# Altium PCB picphlipvfdnew.PcbDoc (part 1 of 2)
Units mm, origin at the board's own origin, x right, y up, seen from the top; angles counter-clockwise.
Board outline 243.3 x 58.75 mm, 4 copper layers (Top Layer, Internal Plane 1, Internal Plane 2, Bottom Layer); 81 components, 82 nets, 400 pads, 146 vias.
Unrouted connection lines stored in the file: 61.
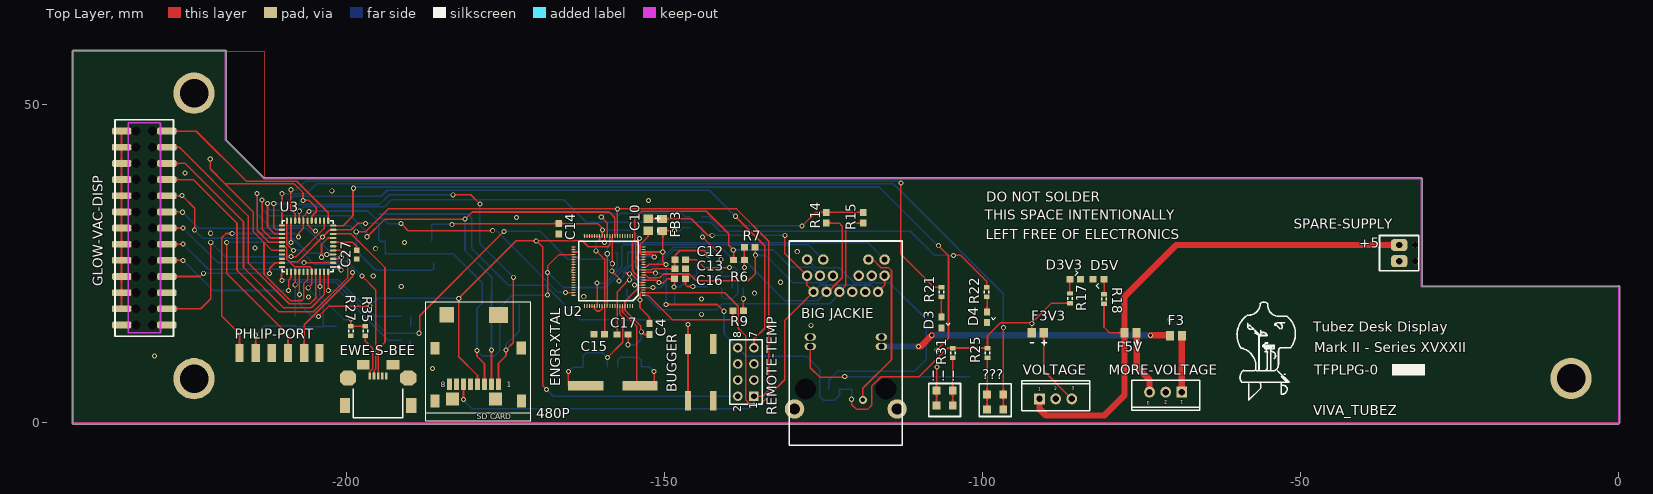
[diagram p0: Top Layer view]
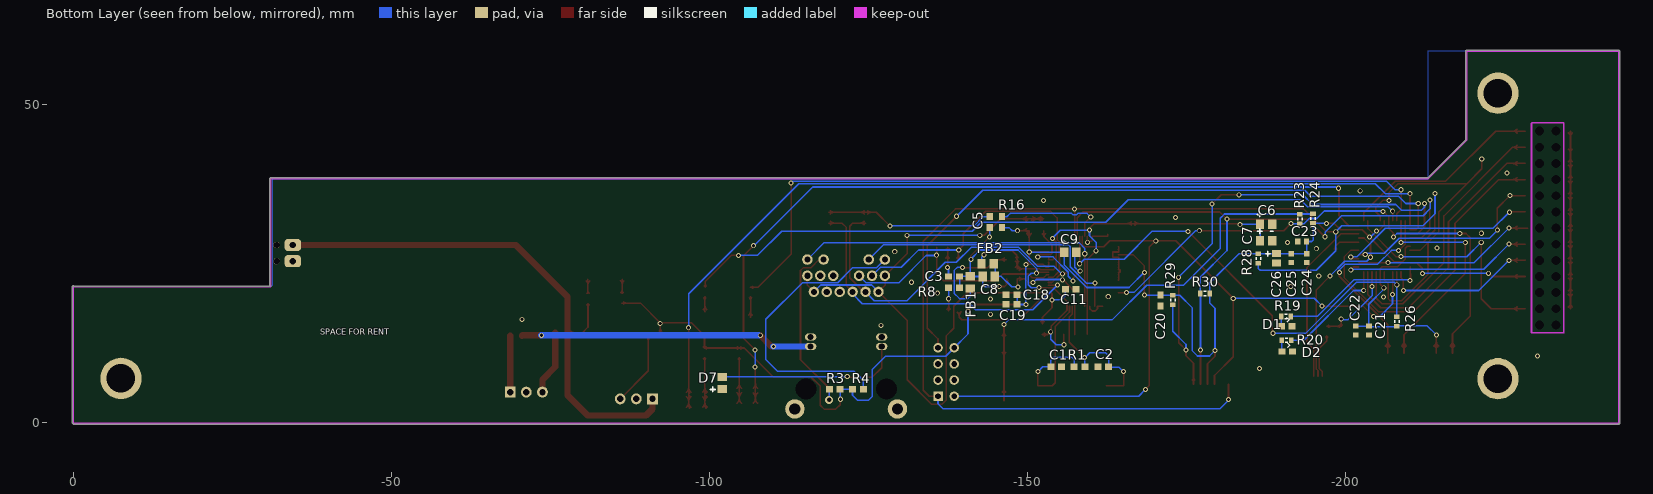
[diagram p1: Bottom Layer view, seen from below]
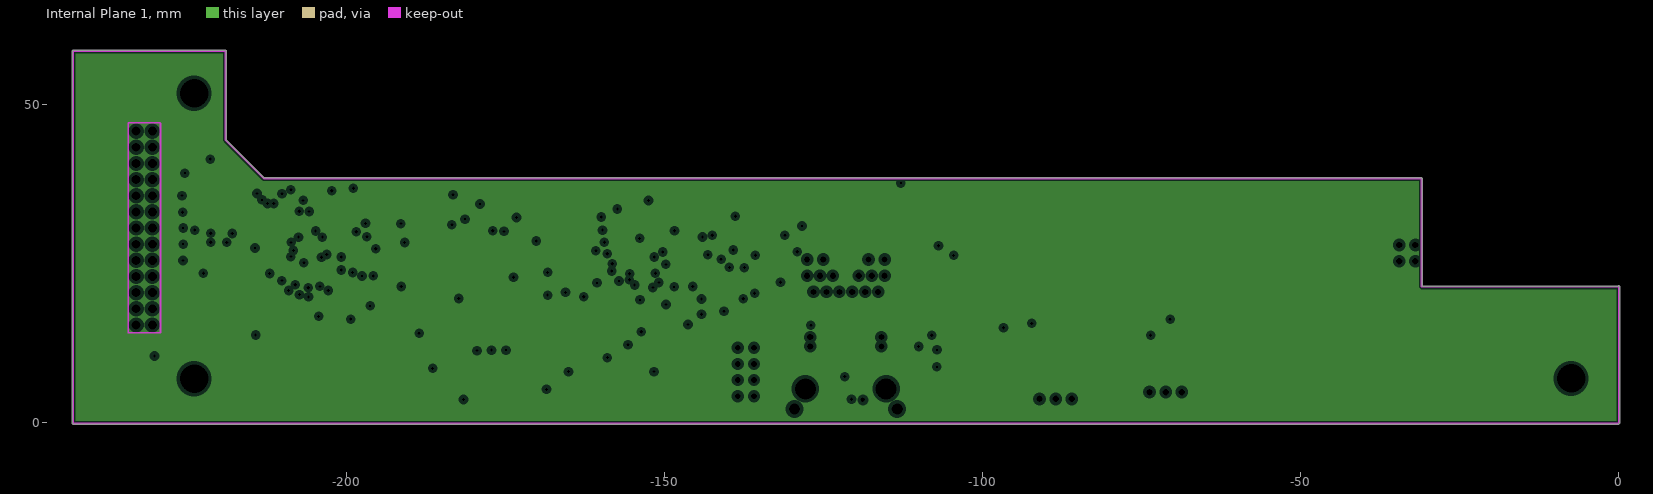
[diagram p2: Internal Plane 1, clearances drawn from the general rule]
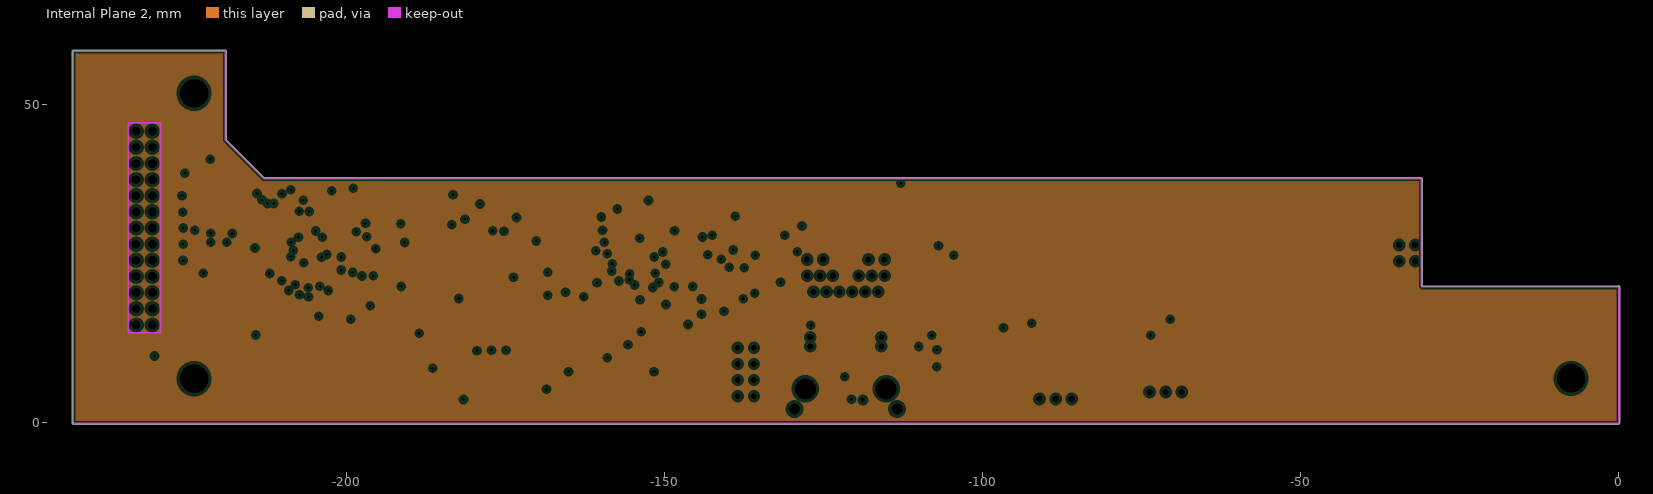
[diagram p3: Internal Plane 2, clearances drawn from the general rule]
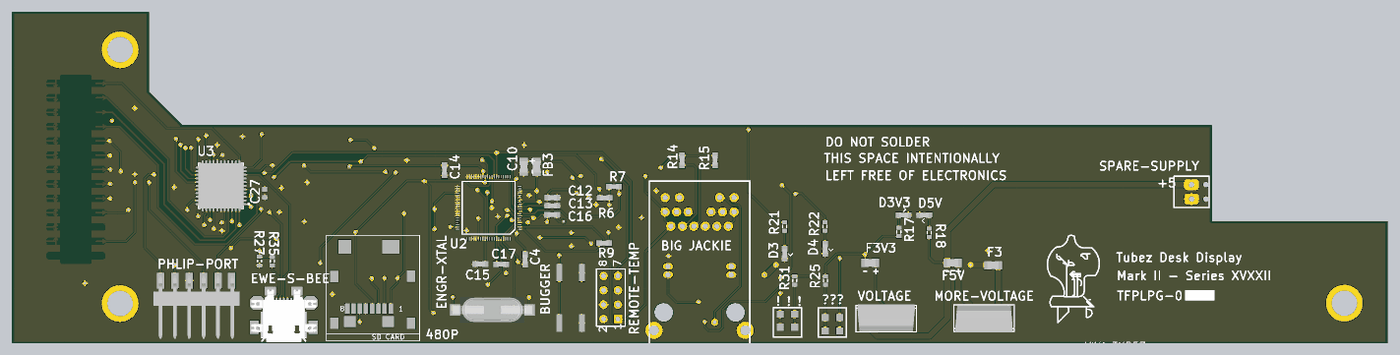
[diagram p5: 3D render of the assembled board from above, using the file's embedded part models]
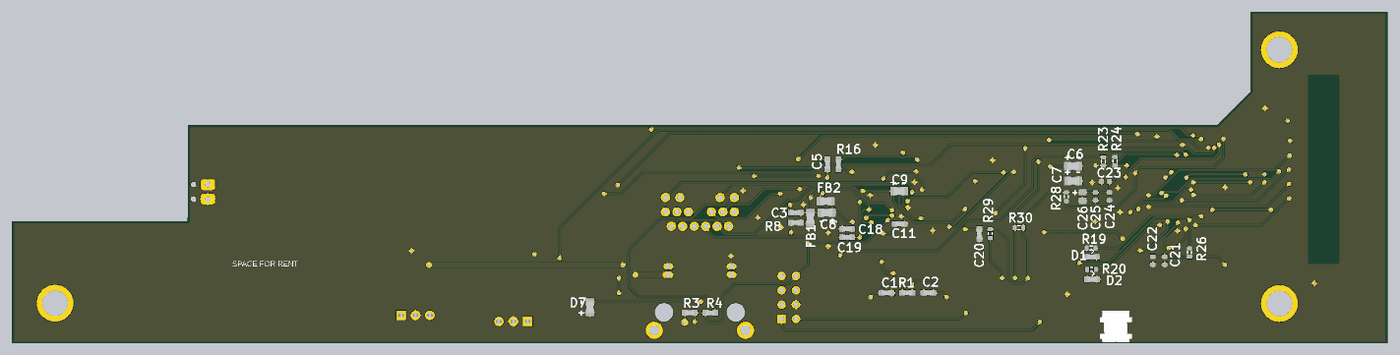
[diagram p6: 3D render of the assembled board from below, using the file's embedded part models]

## Layer stack, top to bottom
Top Layer: signal copper 0.0356
Dielectric: dielectric 0.32, FR-4, Dk 4.8
Internal Plane 1: plane copper 0.0356
Dielectric: dielectric 0.32, FR-4, Dk 4.8
Internal Plane 2: plane copper 0.0356
Dielectric: dielectric 0.32, FR-4, Dk 4.8
Bottom Layer: signal copper 0.0356

## Board outline
-243.05,-0.177 cw(c-243.05,-0.05) -243.177,-0.05 -243.177,58.45 cw(c-243.05,58.45) -243.05,58.577 -219.1,58.577 cw(c-219.1,58.45) -218.973,58.45 -218.973,44.496 -212.997,38.52 -31.05,38.52 cw(c-31.05,38.393) -30.923,38.393 -30.923,21.52 -0.076,21.52 cw(c0,21.418) 0.127,21.418 0.127,0 cw(c0,0) 0.062,-0.112 cw(c-0.05,-0.05) -0.05,-0.177

## Design rules (kind name [scope] priority, off if disabled: settings)
Clearance [All] p1: gap=0.12
Height Height_1 [All] p1: minheight=0 maxheight=30 prefheight=12.7
Height [All] p2: minheight=0 maxheight=25.4 prefheight=12.7
PlaneClearance [All] p1: clearance=0.508
PlaneConnect [All] p1: planeconnectstyle=Relief reliefexpansion=0.508 reliefentries=4 reliefconductorwidth=0.254 reliefairgap=0.254
PolygonConnect [All] p1: connectstyle=Relief reliefconductorwidth=0.254 reliefentries=4 polygonreliefangle="90 Angle"
RoutingVias [All] p1: holewidth=0.5 width=0.8 viastyle="Through Hole" minholewidth=0.5 minwidth=0.8 maxholewidth=0.5 maxwidth=1
SilkscreenOverComponentPads [All] p1: minsilkscreentomaskgap=0.254
SolderMaskExpansion [All] p1: expansion=0.102
Width [All] p1: maxlimit=1 minlimit=0.25 preferedwidth=0.25
24 further rules are at their usual default settings.

## Components (designator, comment, footprint, x,y, rotation, side; value= is the part's Value field where it differs from the comment)
480P "SD" MICRO-SD -176.175,6.05 r180 top (schematic designator SD)
"! ! !" "SW-PB" SWITCH7914 -107.275,5.075 r0 top (schematic designator S2)
??? "SW-PB" SWITCH7914 -96.8,2.125 r180 top (schematic designator S1)
"BIG JACKIE" "RJ113BZ_0" POE -121.55,25.693 r270 top (schematic designator RJ45)
BUGGER "SW-PB" SWITCH-TACTILE-SPST-SMT-GULL-NO-KST241GLFS -144.375,7.95 r90 top (schematic designator MCLR)
C1 "13p" CAP-0603 -154.576,8.828 r180 bottom
C2 "13p" CAP-0603 -161.975,8.85 r0 bottom
C3 "0.1uF" CAP-0603 -138.5,23.025 r0 bottom
C4 "0.1uF" CAP-0603 -152.425,14.75 r270 top
C5 "0.1uF" CAP-0603 -144.125,31.575 r270 bottom
C6 "3.3uF/16V" CAP-0805 -187.6,31.25 r180 bottom
C7 "10uF/16V" CAP-0805 -187.6,28.625 r180 bottom
C8 "10uF/16V" CAP-0805 -143.975,23.025 r0 bottom
C9 "10uF/16V" CAP-0805 -156.8,26.85 r180 bottom
C10 "10uF/16V" CAP-0805 -152.65,31.15 r270 top
C11 "0.01uF" CAP-0603 -156.875,21.025 r180 bottom
C12 "0.1uF" CAP-0603 -147.6,25.675 r0 top
C13 "0.1uF" CAP-0603 -147.6,24.225 r0 top
C14 "0.1uF" CAP-0603 -166.675,30.525 r270 top
C15 "0.1uF" CAP-0603 -160.325,13.925 r180 top
C16 "0.1uF" CAP-0603 -147.625,22.65 r0 top
C17 "0.1uF" CAP-0603 -156.65,13.9 r0 top
C18 "0.1uF" CAP-0603 -147.575,20.15 r0 bottom
C19 "0.1uF" CAP-0603 -147.575,18.675 r0 bottom
C20 "0.1uF" CAP-0603 -170.975,19.25 r270 bottom
C21 "Cap Semi" 1608[0603] -203.775,14.525 r90 bottom
C22 "Cap Semi" 1608[0603] -201.675,14.525 r90 bottom
C23 "Cap Semi" 1608[0603] -193.275,28.525 r180 bottom
C24 "Cap Semi" 1608[0603] -194,25.9 r90 bottom
C25 "Cap Semi" 1608[0603] -191.55,25.9 r90 bottom
C26 "Taint" C0805 -189.25,25.875 r270 bottom
C27 "Cap Semi" 1608[0603] -198.475,26.45 r90 top
D1 "LED1" LED-SMT-0603 -190.85,15.175 r180 bottom
D2 "LED1" LED-SMT-0603 -190.925,11.225 r180 bottom
D3 "LED1" LED-SMT-0603 -106.5,15.775 r270 top
D3V3 "LED1" LED-SMT-0603 -85.476,22.603 r0 top
D4 "LED1" LED-SMT-0603 -99.35,16.625 r270 top
D5V "LED1" LED-SMT-0603 -81.8,22.6 r180 top
D7 "Diode" CAP-0805 -102.1,6.275 r90 bottom
ENGR-XTAL "25MHz (SMD)" XTAL-20MHZ-ATS200-SM -158.201,5.828 r180 top (schematic designator Y1)
EWE-S-BEE "USB" CONN-USB-MICROB-SMT -196.4,7.375 r180 top (schematic designator USB)
F3 "Fuse 1" INDUCTOR-0805 -69.625,13.7 r0 top
F3V3 "Fuse 1" CAP-0805 -91.375,14.153 r180 top
F5V "Fuse 1" CAP-0805 -76.776,14.153 r180 top
FB1 "1uH" INDUCTOR-0805 -141.075,22.1 r270 bottom
FB2 "1uH" INDUCTOR-0805 -143.8,25.05 r180 bottom
FB3 "1uH" INDUCTOR-0805 -150.4,31.125 r90 top
GLOW-VAC-DISP "VFD" HDR13F -236.075,72.683 r270 top (schematic designator P1)
MORE-VOLTAGE "5V" TO-220 -71.25,4.85 r180 top (schematic designator VR5V)
PHLIP-PORT "PGRM" CONN-HEADER-HOR-SMT-1X6 -216.9,10.975 r0 top (schematic designator PGRM)
R1 "1M" RES-0603 -158.251,8.853 r0 bottom
R3 "200" RES-0603 -119.751,5.303 r180 bottom
R4 "200" RES-0603 -123.401,5.303 r0 bottom
R6 "49.9" RES-0603 -138.35,25.625 r0 top
R7 "49.9" RES-0603 -136.675,27.625 r180 top
R8 "300 (1%)" CAP-0603 -138.525,21.25 r0 bottom
R9 "12K (1%)" RES-0603 -138.475,17.625 r180 top
R14 "49.9" RES-0603 -124.655,32.276 r270 top
R15 "49.9" RES-0603 -118.813,32.276 r270 top
R16 "4.7K" RES-0603 -146.05,31.575 r90 bottom
R17 "Res3" J1-0603 -86.3,19.6 r90 top
R18 "Res3" J1-0603 -80.95,19.475 r90 top
R19 "Res3" J1-0603 -190.75,16.75 r0 bottom
R20 "Res3" J1-0603 -190.825,13 r0 bottom
R21 "Res3" J1-0603 -106.5,20.575 r270 top
R22 "Res3" J1-0603 -99.4,20.575 r270 top
R23 "Res3" J1-0603 -192.9,32.1 r90 bottom
R24 "Res3" J1-0603 -194.975,32.125 r270 bottom
R25 "Res3" J1-0603 -99.275,11.025 r90 top
R26 "Res3" J1-0603 -208.15,15.95 r270 bottom
R27 "Res3" J1-0603 -199.4,14.45 r90 top
R28 "Res3" J1-0603 -186.375,25.85 r90 bottom
R29 "Res3" J1-0603 -172.925,19.325 r270 bottom
R30 "Res3" J1-0603 -178,20.35 r0 bottom
R31 "Res3" J1-0603 -104.725,11.025 r90 top
R35 "Res3" J1-0603 -197.125,14.425 r270 top
REMOTE-TEMP "Header 4X2" HDR2X4 -136,4.2 r90 top (schematic designator TEMP)
SPARE-SUPPLY "vfd_supply" PHO2POS2.54 -31.425,29.475 r270 top (schematic designator P2)
U2 "W5100" QUAD80 -153.376,20.078 r180 top
U3 "pic24fj64gb005" QFN-44 -206.2,27.775 r180 top
VOLTAGE "3.3V" TO-220 -88.55,3.775 r0 top (schematic designator VR3V3)

## Footprints (in the part's own frame and the unit in brackets; to place one, negate y for a bottom-side part, rotate by r counter-clockwise, add the part's x,y. Pads: shape width x height; smd on the part's side, far side on the other; paste and mask are expansions set on the pad)
1608[0603] [mm] "Chip Capacitor, Body 1.6x0.8mm, IPC High Density"
  rect 0.8x0.9 smd: 1(-0.7,0) 2(0.7,0)
  body extent -0.87,-0.48 0.87,0.48, height 1.3
C0805 [mm] "Chip Capacitor, Body 2.0x1.3mm, IPC High Density"
  rect 1.1x1.4 smd: 1(-0.75,0) 2(0.75,0)
  body extent -1.1,-0.72 1.1,0.72, height 1.4
CAP-0603 [mm]
  rect 1.1x1 smd: 1(-0.85,0) 2(0.85,0)
  body extent -0.8,-0.43 0.8,0.43, height 0.88
CAP-0805 [mm]
  rect 1.3x1.5 smd: 1(-0.95,0) 2(0.95,0)
  silkscreen extent -1.4,1.14 1.14,1.91, body extent -1,-0.65 1,0.66, height 0.78
CONN-HEADER-HOR-SMT-1X6 [mm]
  rect 1.3x2.8 smd: 1(0,0) 2(2.54,0) 3(5.08,0) 4(7.62,0) 5(10.16,0) 6(12.57,0)
  body extent -1.27,-10.23 13.97,0.87, height 2.52
CONN-USB-MICROB-SMT [mm]
  rect 0.4x1.05 smd: 1(0,0) 2(-0.65,0) 3(-1.3,0) 4(-1.95,0) 5(-2.6,0)
  rect 2x1.5 smd: 6(1.05,-1.775) 7(-3.65,-1.775)
  oct 2.55x2.4 smd: 8(3.425,0.325) 9(-6.025,0.325)
  rect 1.6x2.4 smd: 10(3.9,4.625) 11(-6.5,4.625)
  silkscreen extent -5.2,2 2.6,6.53, body extent -7.05,-2.03 4.45,7.26, height 1.56
HDR2X4 [mm] "Connector; Header; 4x2 Position"
  rect 1.5x1.5 hole 0.9: 1(0,0)
  round 1.5 hole 0.9: 2(0,2.54) 3(2.54,0) 4(2.54,2.54) 5(5.08,0) 6(5.08,2.54) 7(7.62,0) 8(7.62,2.54)
  silkscreen extent -1.27,-1.27 8.89,3.81
HDR13F [mil]
  rrect50% 42x120 smd mask+3: 1(2255,305) 2(2255,25) 3(2155,305) 4(2155,25) 5(2055,305) 6(2055,25) 7(1955,305) 8(1955,25) 9(1855,305) 10(1855,25) 11(1755,305) 12(1755,25) 13(1655,305) 14(1655,25) 15(1555,305) 16(1555,25) 17(1455,305) 18(1455,25) 19(1355,305) 20(1355,25) 21(1255,305) 22(1255,25) 23(1155,305) 24(1155,25) 25(1055,305) 26(1055,25)
  round 0 hole 55 unplated: 25(2155,215) 26(2155,115) 27(2055,215) 28(2055,115) 29(1955,215) 30(1955,115) 31(1855,215) 32(1855,115) 33(1755,215) 34(1755,115) 35(1655,215) 36(1655,115) 37(1555,215) 38(1555,115) 39(1455,215) 40(1455,115) 41(1355,215) 42(1355,115) 43(1255,215) 44(1255,115) 45(1155,215) 46(1155,115) 47(1055,215) 48(1055,115) 49(2255,115) 50(2255,215)
  silkscreen extent 985,-16 2325,346
INDUCTOR-0805 [mm]
  rect 1.3x1.5 smd: 1(-0.95,0) 2(0.95,0)
  body extent -1,-0.65 1,0.66, height 0.78
J1-0603 [mm] "Chip Resistor, Body 1.6x0.8mm, IPC High Density"
  rect 0.7x0.9 smd: 1(-0.75,0) 2(0.75,0)
  silkscreen extent -0.2,-0.35 0.2,0.35, body extent -0.85,-0.48 0.85,0.48, height 0.9
LED-SMT-0603 [mm]
  rect 1.1x1 smd: 1(-0.85,0) 2(0.85,0)
  silkscreen extent 0,0.64 0.38,1.4, body extent -0.8,-0.41 0.8,0.45, height 0.75
MICRO-SD [mm]
  rect 0.8x1.8 smd: 1(0,0) 2(1.1,0) 3(2.2,0) 4(3.3,0) 5(4.4,0) 6(5.5,0) 7(6.6,0) 8(7.7,0)
  rect 1.45x2 smd: 9(-3.6,2.6) 12(10,2.6) 13(-3.581,-5.715) 14(9.982,-5.69)
  rect 2.05x2 smd: 10(0.483,2.3) 11(7.239,2.3)
  rect 3x2.45 smd: 15(-0.025,-10.922)
  rect 2.25x2.45 smd: 16(8.153,-10.947)
  silkscreen extent -5.08,-12.98 11.4,5.72
PHO2POS2.54 [mm]
  round 1 hole 1: 0(1.5,-0.56) 0(4.04,-0.56)
  rrect50% 1.905x2.54 hole 1: 1(1.5,-3.1) 2(4.04,-3.1)
  silkscreen extent 0,-6.2 5.54,0
POE [mil]
  round 65 hole 38: 1(200,200) 2(200,120) 3(200,40) 4(200,-40) 5(200,-120) 6(200,-200) 7(100,240) 8(100,160) 9(100,80) 10(100,-80) 11(100,-160) 12(100,-240) 13(0,240) 14(0,140) 15(0,-140) 16(0,-240)
  round 0 hole 130 unplated: 26(800,250) 27(800,-250)
  round 120 hole 70: 28(925,317.5) 29(925,-317.5)
  oval 45x70 hole 38: P1(480,220) P2(480,-220) P3(538,220) P4(538,-220)
  silkscreen extent -115,-350 1150,350
QFN-44 [mm]
  oval 1x0.35 smd: 1(-4.025,3.25) 2(-4.025,2.6) 3(-4.025,1.95) 4(-4.025,1.3) 5(-4.025,0.65) 6(-4.025,0) 7(-4.025,-0.65) 8(-4.025,-1.3) 9(-4.025,-1.95) 10(-4.025,-2.6) 11(-4.025,-3.25) 23(4.025,-3.25) 24(4.025,-2.6) 25(4.025,-1.95) 26(4.025,-1.3) 27(4.025,-0.65) 28(4.025,0) 29(4.025,0.65) 30(4.025,1.3) 31(4.025,1.95) 32(4.025,2.6) 33(4.025,3.25)
  oval 0.35x1 smd: 12(-3.25,-4.025) 13(-2.6,-4.025) 14(-1.95,-4.025) 15(-1.3,-4.025) 16(-0.65,-4.025) 17(0,-4.025) 18(0.65,-4.025) 19(1.3,-4.025) 20(1.95,-4.025) 21(2.6,-4.025) 22(3.25,-4.025) 34(3.25,4.025) 35(2.6,4.025) 36(1.95,4.025) 37(1.3,4.025) 38(0.65,4.025) 39(0,4.025) 40(-0.65,4.025) 41(-1.3,4.025) 42(-1.95,4.025) 43(-2.6,4.025) 44(-3.25,4.025)
  silkscreen extent -5.03,-4 4,4, body extent -4,-4 4,4, height 0.9
QUAD80 [mm]
  oval 0.6x0.16 smd: 1(0,0)
  rect 0.6x0.16 smd: 2(0,-0.4) 3(0,-0.8) 4(0,-1.2) 5(0,-1.6) 6(0,-2) 7(0,-2.4) 8(0,-2.8) 9(0,-3.2) 10(0,-3.6) 11(0,-4) 12(0,-4.4) 13(0,-4.8) 14(0,-5.2) 15(0,-5.6) 16(0,-6) 17(0,-6.4) 18(0,-6.8) 19(0,-7.2) 20(0,-7.6) 41(11,-7.6) 42(11,-7.2) 43(11,-6.8) 44(11,-6.4) 45(11,-6) 46(11,-5.6) 47(11,-5.2) 48(11,-4.8) 49(11,-4.4) 50(11,-4) 51(11,-3.6) 52(11,-3.2) 53(11,-2.8) 54(11,-2.4) 55(11,-2) 56(11,-1.6) 57(11,-1.2) 58(11,-0.8) 59(11,-0.4) 60(11,0)
  rect 0.16x0.6 smd: 21(1.7,-9.3) 22(2.1,-9.3) 23(2.5,-9.3) 24(2.9,-9.3) 25(3.3,-9.3) 26(3.7,-9.3) 27(4.1,-9.3) 28(4.5,-9.3) 29(4.9,-9.3) 30(5.3,-9.3) 31(5.7,-9.3) 32(6.1,-9.3) 33(6.5,-9.3) 34(6.9,-9.3) 35(7.3,-9.3) 36(7.7,-9.3) 37(8.1,-9.3) 38(8.5,-9.3) 39(8.9,-9.3) 40(9.3,-9.3) 61(9.3,1.7) 62(8.9,1.7) 63(8.5,1.7) 64(8.1,1.7) 65(7.7,1.7) 66(7.3,1.7) 67(6.9,1.7) 68(6.5,1.7) 69(6.1,1.7) 70(5.7,1.7) 71(5.3,1.7) 72(4.9,1.7) 73(4.5,1.7) 74(4.1,1.7) 75(3.7,1.7) 76(3.3,1.7) 77(2.9,1.7) 78(2.5,1.7) 79(2.1,1.7) 80(1.7,1.7)
  silkscreen extent 0.83,-8.46 10.16,0.86
RES-0603 [mm]
  rect 1.1x1 smd: 1(-0.85,0) 2(0.85,0)
  body extent -0.8,-0.41 0.8,0.45, height 0.53
SWITCH7914 [mil]
  rect 49x49 smd: 1(0,-92) 1(0,0) 2(100,-92) 2(100,0)
  silkscreen extent -49,-160 148,44
SWITCH-TACTILE-SPST-SMT-GULL-NO-KST241GLFS [mm]
  rect 3.1x1 smd: 1(-4.45,2) 1(4.45,2) 2(-4.45,-2) 2(4.45,-2)
  body extent -3.18,-3.18 3.18,3.18, height 5.2
TO-220 [mm]
  rect 1.7x1.7 hole 1: 1(-2.54,0)
  round 1.7 hole 1: 2(0,0) 3(2.54,0)
  silkscreen extent -5.35,-1.85 5.35,2.85, body extent -5.08,-1.79 5.08,3.01, height 19.1
XTAL-20MHZ-ATS200-SM [mil]
  rect 217x59 smd: 1(-167.5,0) 2(167.5,0)
  body extent -295,-89 295,89, height 201

## Part data
480P: library part MHDR1X7, "Header, 7-Pin"
"! ! !" ??? BUGGER: "Switch"
C1 C2 C3 C4 C5 C12 C13 C14 C15 C16 C17 C18 C19 C20: library part "CAP NP"
C6 C7 C8 C9 C10: library part CAP_4.7uF_B
C11: library part CAP_0.01uF_0603
C21 C22 C23 C24 C25 C27: "Capacitor (Semiconductor SIM Model)"
C26: library part "Cap Pol3", "Polarized Capacitor (Surface Mount)"
D1 D2 D3 D3V3 D4 D5V: "Typical RED GaAs LED"
D7: "Default Diode"
ENGR-XTAL: library part CRYSTAL
EWE-S-BEE: library part MHDR1X4, "Header, 4-Pin"
F3 F3V3 F5V: "Fuse"
FB1 FB2 FB3: library part FB_0805
GLOW-VAC-DISP: library part "Header 13X2", "Header, 13-Pin, Dual row"
MORE-VOLTAGE VOLTAGE: library part "Volt Reg", "Voltage Regulator"
PHLIP-PORT: library part MHDR1X6, "Header, 6-Pin"
R1 R8 R9: library part R_Dup1
R3 R4 R6 R7 R14 R15 R16: library part R
R17 R18 R19 R20 R21 R22 R23 R24 R25 R26 R27 R28 R29 R30 R31 R35: "Resistor"
REMOTE-TEMP: "Header, 4-Pin, Dual row"
SPARE-SUPPLY: library part "Header 2", "Header, 2-Pin"
U2: library part W5100_7
U3: library part pic24fj64gb108-x, "Imported"

## Free pads (board coordinates)
  round 6.5 hole 4.5 unplated: 0(-224.05,6.95) 0(-224.05,51.85) 0(-7.5,7)

## Via types
v1: diameter 0.8, hole 0.5, Top Layer to Bottom Layer, 145 vias
v2: diameter 1.27, hole 0.711, Top Layer to Bottom Layer, 1 vias

## Nets (pads, with @x,y where several pads share a name; then routed paths per layer and width w, separated by ;. In a path a pad name is that pad's centre, name@x,y a point inside that pad or via, vN(x,y) a via of type N, cw(c..) or ccw(c..) an arc to the next point about the centre after c; other vN are vias at no path point)
1V8_OUT: C6.1 C7.1 C12.1 C13.1 C14.1 C15.1 FB2.1 U2.11 U2.15 U2.16 U2.33 U2.69 | length 85.3
  Top Layer w0.25: v1@-183.55,31.3 v1(-183.5,31.175) -183.325,31.35 -160.58,31.35 -159.876,30.646 v1@-159.876,30.254 ; -167.641,31.35 ccw(c-167.641,32.341) C14.1@-166.94,31.64 ; -167.52,31.35 cw(c-167.52,30.53) C14.1@-166.94,31.11 ; C14.1@-166.41,31.11 cw(c-165.83,30.53) -165.83,31.35 ; C14.1@-166.41,31.64 ccw(c-165.709,32.341) -165.709,31.35 ; v1(-160.856,27.065) -159.476,25.685 U2.69@-159.476,18.378 -159.476,16.574 -159.475,16.573 C15.1@-159.475,13.925 ; U2.33@-159.876,29.378 v1@-159.876,30.254 ; v1(-159.814,30.316) v1@-159.876,30.254 ; v1(-153.975,29.025) -154.6,28.4 -154.6,26.225 ; U2.15@-153.376,25.678 U2.15@-153.388,25.678 ; U2.16@-153.376,26.078 -153.388,26.066 U2.15@-153.388,25.678 ; C13.1@-148.765,23.96 ccw(c-149.405,23.32) -149.405,24.225 ccw(c-149.405,25.13) C13.1@-148.765,24.49 ; C13.1@-148.715,24.49 ccw(c-149.355,25.13) -148.45,25.13 ccw(c-147.545,25.13) C13.1@-148.185,24.49 ; C12.1@-148.715,25.41 cw(c-149.355,24.77) -148.45,24.77 cw(c-147.545,24.77) C12.1@-148.185,25.41 ; C12.1@-148.597,25.994 ccw(c-148.819,26.353) -148.397,26.353 ; C12.1@-148.199,25.991 cw(c-147.968,26.353) -148.397,26.353 ; v1(-143.24,26.453) -143.862,27.075 -147.675,27.075 -148.397,26.353 ; -154.6,26.225 -154.6,25.85 -154.6,24.525 -154.153,24.078 U2.11@-153.376,24.078 -152.113,24.078 -151.966,24.225 C13.1@-148.45,24.225 C12.1@-148.45,25.675 -148.397,25.728 -148.397,26.353 ; -154.6,26.225 -154.053,25.678 U2.15@-153.388,25.678
  Bottom Layer w0.25: C7.1@-186.65,28.625 C6.1@-186.65,31.25 -183.6,31.25 v1(-183.5,31.175) ; v1(-160.856,27.065) -160.856,28.394 -159.814,29.436 v1(-159.814,30.316) -155.216,30.316 v1@-154.175,29.275 ; v1(-143.24,26.453) -142.85,26.063 FB2.1@-142.85,25.05 FB2.1@-143.003,25.05
1V8A: C8.1 C16.1 C17.1 FB2.2 U2.7 U2.74 | length 28.7
  Top Layer w0.25: C17.1@-157.5,13.9 -157.476,13.924 U2.74@-157.476,18.378 -157.476,20.599 v1@-155.7,22.55 ; U2.7@-153.376,22.478 -153.353,22.455 -151.33,22.455 v1(-150.95,22.075) -150.225,22.075 -149.65,22.65 C16.1@-148.475,22.65 -148.475,21.775 v1@-148.775,21.475 ; C16.1@-148.79,22.385 ccw(c-149.43,21.745) -149.43,22.65 ccw(c-149.43,23.555) C16.1@-148.79,22.915
  Bottom Layer w0.25: v1@-155.7,22.55 -151.425,22.55 v1(-150.95,22.075) ; v1(-148.55,21.4) -147.575,21.4 -145.9,23.075 -144.95,23.075 -144.975,23.1 FB2.2@-144.975,25.1
  other v1: -155.59,22.503
3V3A: "BIG JACKIE.1" "BIG JACKIE.6" "BIG JACKIE.7" "BIG JACKIE.12" C4.1 C10.1 C11.1 FB3.2 U2.2 | length 121.4
  Top Layer w0.25: -153.815,20.433 cw(c-153.596,20.214) U2.2@-153.596,20.523 ; U2.2@-153.581,20.52 ccw(c-153.641,20.35) -153.769,20.478 ; C4.1@-152.69,15.915 ccw(c-153.33,16.555) -152.425,16.555 ccw(c-151.52,16.555) C4.1@-152.16,15.915 ; C10.1@-152.65,32.1 -150.35,32.1 -145.875,32.1 -143.278,29.503 v1(-142.568,29.503) v1@-142.618,29.554 ; C4.1@-152.425,15.6 -152.425,16.625 -153.921,18.121 v1(-153.921,19.343) -153.921,20.326 -153.769,20.478 ; C10.1@-152.356,31.906 cw(c-151.886,31.436) -151.886,32.1 cw(c-151.886,32.764) C10.1@-152.356,32.294 ; C10.1@-152.179,31.729 cw(c-151.283,30.833) -151.283,32.1 cw(c-151.283,33.367) C10.1@-152.179,32.471 ; -151.828,32.1 cw(c-151.828,30.747) FB3.2@-150.871,31.704 ; -151.707,32.1 ccw(c-151.707,33.282) FB3.2@-150.871,32.446 ; -151.224,32.1 cw(c-151.224,31.351) FB3.2@-150.694,31.881 ; FB3.2@-150.106,31.881 cw(c-149.576,31.351) -149.576,32.1 ; FB3.2@-149.929,31.704 cw(c-148.972,30.747) -148.972,32.1 ; FB3.2@-149.929,32.446 ccw(c-149.093,33.282) -149.093,32.1 ; v1(-131.138,29.503) -131.138,26.645 -127.646,23.153 ; -127.7,22.925 -127.7,21.683 -126.63,20.613 -131.138,16.105 -131.138,6.77 -134.973,2.935 -136.624,2.935 -137.259,3.57 -137.259,13.679 -138.475,14.895 -138.475,18.35 -140.603,20.478 U2.2@-153.376,20.478 -153.769,20.478 ; -116.47,20.613 -115.454,21.629 -115.454,23.153
  Bottom Layer w0.25: C11.1@-156.025,21.025 -156.025,20.05 -155.318,19.343 v1(-153.921,19.343) ; v1(-142.568,29.503) v1(-131.138,29.503) ; -126.63,20.613 -125.56,21.684 -117.541,21.684 -116.47,20.613
3V3D: 480P.3 C9.1 C18.1 C19.1 C20.1 C21.2 C22.2 C23.2 C24.2 C25.2 C26.1 F3V3.2 FB3.1 PHLIP-PORT.2 R3.2 R4.2 R16.1 R17.1 R24.2 R25.2 R26.2 R28.2 R29.1 R30.1 R31.2 REMOTE-TEMP.8 U2.12 U2.18 U2.44 U3.10 U3.17 U3.28 U3.40 | length 272.5
  Top Layer w0.25: PHLIP-PORT.2@-214.731,12.096 ccw(c-215.627,12.992) -214.36,12.992 ccw(c-213.093,12.992) PHLIP-PORT.2@-213.989,12.096 ; PHLIP-PORT.2@-214.554,11.919 ccw(c-215.024,12.389) -214.36,12.389 ccw(c-213.696,12.389) PHLIP-PORT.2@-214.166,11.919 ; PHLIP-PORT.2@-214.36,10.975 v1@-214.36,13.81 ; U3.28@-210.225,27.775 -209.775,27.775 -209.47,27.47 -209.47,25.783 -209.044,25.356 ; v1@-206.2,21.15 -205.55,21.8 U3.40@-205.55,23.75 -205.55,24.25 -205.855,24.555 -208.242,24.555 -209.044,25.356 ; U3.17@-206.2,31.8 -206.2,31.15 v1@-205.084,30.034 ; v1(-197.09,31.378) -198.322,31.378 -199.325,30.375 U3.10@-202.175,30.375 -202.7,30.375 -207.719,25.356 -209.044,25.356 ; v1(-179.55,11.375) -179.55,10.5 -178.375,9.325 480P.3@-178.375,6.05 ; v1(-168.45,20.1) v1(-168.45,23.675) -168.45,24.675 -166.647,26.478 U2.44@-164.376,26.478 ; U2.12@-153.376,24.478 -153.007,24.478 -152.56,24.925 v1(-149.85,24.925) -150.34,25.415 v1(-150.34,26.878) ; U2.18@-153.376,26.878 v1(-150.34,26.878) ; FB3.1@-150.671,29.804 cw(c-151.471,29.004) -150.34,29.004 ; -150.34,28.811 cw(c-148.936,28.811) FB3.1@-149.929,29.804 ; -150.34,29.415 cw(c-149.54,29.415) -150.106,29.981 cw(c-149.576,29.451) -149.576,30.2 ; FB3.1@-149.929,30.546 ccw(c-149.093,31.382) -149.093,30.2 ; v1(-149.825,18.625) -141.773,18.625 v1(-140.713,17.565) ; v1@-148.5,30.2 -150.35,30.2 -150.34,30.19 v1(-150.34,26.878) ; v1(-120.65,3.725) -120.625,3.7 -120.625,2.875 -119.925,2.175 -118.075,2.175 -117.454,2.796 -117.454,5.8 -115.985,7.269 -110.031,7.269 -105.525,11.775 R31.2@-104.725,11.775 R25.2@-99.275,11.775 -99.275,13.725 -97.275,15.725 v1@-92.325,15.725 ; R31.2@-104.984,11.616 ccw(c-105.368,11.232) -105.368,11.775 ccw(c-105.368,12.318) R31.2@-104.984,11.934 ; R31.2@-104.466,11.616 cw(c-104.082,11.232) -104.082,11.775 cw(c-104.082,12.318) R31.2@-104.466,11.934 ; R25.2@-99.534,11.616 ccw(c-99.918,11.232) -99.918,11.775 ccw(c-99.918,12.318) R25.2@-99.534,11.934 ; R25.2@-99.434,11.934 ccw(c-99.818,12.318) -99.275,12.318 ccw(c-98.732,12.318) R25.2@-99.116,11.934 ; F3V3.2@-92.519,14.447 ccw(c-92.989,14.917) -92.325,14.917 ccw(c-91.661,14.917) F3V3.2@-92.131,14.447 ; F3V3.2@-92.325,14.153 v1@-92.325,15.725 ; R17.1@-86.559,18.691 ccw(c-86.943,18.307) -86.943,18.85 ccw(c-86.943,19.393) R17.1@-86.559,19.009 ; R17.1@-86.3,18.85 -89.2,18.85 v1@-92.325,15.725
  Bottom Layer w0.25: v1(-214.375,13.825) -212.95,15.25 -208.2,15.25 R26.2@-208.15,15.2 ; R26.2@-208.15,15.275 -208.025,15.15 C21.2@-203.9,15.15 ; v1@-206.225,21.15 -203.75,18.675 C21.2@-203.75,15.3 ; v1(-204.94,30.178) -204.112,29.35 v1@-204.075,29.35 ; C21.2@-203.625,15.375 C21.2@-203.775,15.225 C22.2@-201.675,15.225 ; v1@-196.925,31.375 R24.2@-194.975,31.375 -194.975,28.725 -194.775,28.525 C23.2@-193.975,28.525 -193.975,26.625 C24.2@-194,26.6 C25.2@-191.55,26.6 ; C25.2@-191.525,26.625 C26.1@-189.25,26.625 -189.225,26.6 R28.2@-186.375,26.6 -186.35,26.575 -183.275,26.575 -178.75,22.05 R30.1@-178.75,20.35 -178.75,18.85 -179.55,18.05 v1(-179.55,11.375) -178.7,10.525 -176.8,10.525 -176,11.325 -176,18.075 -174,20.075 R29.1@-172.925,20.075 -171,20.075 C20.1@-170.975,20.1 v1(-168.45,20.1) ; v1@-168.5,23.775 -166.025,21.3 -159.4,21.3 -155.85,24.85 C9.1@-155.85,26.85 -150.368,26.85 v1(-150.34,26.878) ; v1@-149.825,24.675 v1(-149.825,18.625) -148.475,18.625 C19.1@-148.425,18.675 C18.1@-148.425,20.15 ; v1(-148.49,30.228) -147.672,30.228 -147.175,30.725 R16.1@-146.05,30.725 ; v1(-140.713,17.565) -140.713,13.993 REMOTE-TEMP.8@-138.54,11.82 -137.195,10.475 -127.75,10.475 -125.625,8.35 -125.625,4.1 -125.075,3.55 -123.35,3.55 -122.551,4.349 R4.2@-122.551,5.303 R3.2@-120.601,5.303 -120.65,5.254 v1(-120.65,3.725)
  other v1: -92.3,15.65 -206.1,21.25 -203.875,29.225
5V: F5V.2 R18.1 SPARE-SUPPLY.1 VOLTAGE.1 | length 89.5
  Top Layer w0.25: R18.1@-81.109,18.566 cw(c-81.493,18.182) -80.95,18.182 cw(c-80.407,18.182) R18.1@-80.791,18.566 ; R18.1@-80.95,18.725 -80.95,15.075 -80.075,14.2 F5V.2@-77.726,14.2 ; -79.107,14.2 cw(c-79.107,12.772) F5V.2@-78.097,13.782 ; -78.88,14.2 ccw(c-78.88,15.307) F5V.2@-78.097,14.524 ; -78.503,14.2 cw(c-78.503,13.376) F5V.2@-77.92,13.959
  Top Layer w1: VOLTAGE.1@-91.09,3.775 -91.09,2.19 -90.075,1.175 -80.929,1.175 -77.726,4.378 F5V.2@-77.726,14.153 -77.726,19.849 -69.6,27.975 SPARE-SUPPLY.1@-34.525,27.975
9V: F3.2 MORE-VOLTAGE.1 | length 8.8
  Top Layer w1: MORE-VOLTAGE.1@-68.71,4.85 F3.2@-68.71,13.7
/CS: U2.55
/INT: U2.56
/RESET: PHLIP-PORT.1 R23.1 U2.59 U3.18 | length 86.7
  Top Layer w0.25: v1(-218.056,29.782) -219.032,29.782 -219.692,29.122 -219.692,16.801 -216.9,14.009 PHLIP-PORT.1@-216.9,10.975 ; PHLIP-PORT.1@-217.271,12.096 ccw(c-218.167,12.992) -216.9,12.992 ccw(c-215.633,12.992) PHLIP-PORT.1@-216.529,12.096 ; PHLIP-PORT.1@-217.094,11.919 ccw(c-217.564,12.389) -216.9,12.389 ccw(c-216.236,12.389) PHLIP-PORT.1@-216.706,11.919 ; v1(-207.625,29.225) -207.625,29.825 -206.85,30.6 U3.18@-206.85,31.8 -206.85,32.475 v1@-206,33.325 ; v1@-191.325,31.225 -191.35,31.225 -190.353,30.228 v1(-177.09,30.228) ; v1(-165.64,20.528) -165.59,20.478 U2.59@-164.376,20.478
  Bottom Layer w0.25: v1(-218.056,29.782) -208.182,29.782 v1(-207.625,29.225) ; v1(-205.95,33.241) -205.95,33.288 -205.99,33.328 -196.718,33.328 -195.54,32.15 -194.375,32.15 -193.575,31.35 R23.1@-192.9,31.35 -191.462,31.35 v1(-191.525,31.35) ; v1(-177.09,30.228) -176.503,30.228 -166.8,20.525 v1@-165.625,20.525
/SCS: R26.1 U2.29 U3.36 | length 74.6
  Top Layer w0.25: -208.15,22.137 U3.36@-208.15,23.75 ; v1@-188.575,14.075 -188.575,16.85 v1(-175.3,30.125) ; v1(-158.276,25.033) U2.29@-158.276,29.378
  Bottom Layer w0.25: R26.1@-208.15,16.775 -208.15,21.716 -207.743,22.123 -201.823,22.123 -193.775,14.075 v1@-188.65,14.075 ; v1(-175.3,30.125) -169.65,30.125 -165.275,25.75 -158.993,25.75 v1(-158.276,25.033)
  other v1: -188.665,14.103 -208.145,21.721
/WR: U2.57
D0: U2.26
D1: U2.25
D2: U2.24
D3: U2.23
D4: U2.22
D5: U2.21
D6: U2.20
D7: U2.19
FDX_LED: "BIG JACKIE.13" U2.70 | length 54.2
  Top Layer w0.25: U2.70@-159.076,18.378 v1(-159.076,26.6)
  Bottom Layer w0.25: v1(-159.076,26.6) -159.076,27.447 -158.165,28.358 -118.119,28.358 -115.454,25.693
GND: 480P.5 BUGGER.2 C1.2 C2.2 C6.2 C7.2 C9.2 C10.2 C11.2 C12.2 C13.2 C14.2 C15.2 C18.2 C19.2 C20.2 C21.1 C22.1 C23.1 C24.1 C25.1 C26.2 C27.1 D1.2 D2.2 D3.2 D3V3.2 D4.2 D5V.2 D7.1 EWE-S-BEE.4 FB1.2 GLOW-VAC-DISP.4 GLOW-VAC-DISP.6 GLOW-VAC-DISP.8 GLOW-VAC-DISP.10 GLOW-VAC-DISP.12 GLOW-VAC-DISP.14 GLOW-VAC-DISP.16 GLOW-VAC-DISP.18 GLOW-VAC-DISP.20 GLOW-VAC-DISP.22 GLOW-VAC-DISP.24 GLOW-VAC-DISP.26@-235.44,45.886 MORE-VOLTAGE.2 PHLIP-PORT.3 R27.1 REMOTE-TEMP.4 SPARE-SUPPLY.2 U2.13 U2.14 U2.17 U2.32 U2.34 U2.35 U2.36 U2.37 U2.38 U2.39 U2.40 U2.41 U2.42 U2.43 U2.45 U2.46 U2.47 U2.48 U2.49 U2.50 U2.51 U2.52 U2.53 U2.54 U2.63 U2.64 U2.65 U2.68 U3.16 U3.29 U3.39 VOLTAGE.2 | length 173.8
  Top Layer w0.25: GLOW-VAC-DISP.4@-235.729,18.235 ccw(c-236.389,18.895) -235.455,18.895 ; GLOW-VAC-DISP.6@-235.729,20.197 cw(c-236.389,19.537) -235.455,19.537 ; GLOW-VAC-DISP.6@-235.729,20.775 ccw(c-236.389,21.435) -235.455,21.435 ; GLOW-VAC-DISP.8@-235.729,22.737 cw(c-236.389,22.077) -235.455,22.077 ; GLOW-VAC-DISP.8@-235.729,23.315 ccw(c-236.389,23.975) -235.455,23.975 ; GLOW-VAC-DISP.10@-235.729,25.277 cw(c-236.389,24.617) -235.455,24.617 ; GLOW-VAC-DISP.10@-235.729,25.855 ccw(c-236.389,26.515) -235.455,26.515 ; GLOW-VAC-DISP.12@-235.729,27.817 cw(c-236.389,27.157) -235.455,27.157 ; GLOW-VAC-DISP.12@-235.729,28.395 ccw(c-236.389,29.055) -235.455,29.055 ; GLOW-VAC-DISP.14@-235.729,30.357 cw(c-236.389,29.697) -235.455,29.697 ; GLOW-VAC-DISP.14@-235.729,30.935 ccw(c-236.389,31.595) -235.455,31.595 ; GLOW-VAC-DISP.16@-235.729,32.897 cw(c-236.389,32.237) -235.455,32.237 ; GLOW-VAC-DISP.16@-235.729,33.475 ccw(c-236.389,34.135) -235.455,34.135 ; GLOW-VAC-DISP.18@-235.729,35.437 cw(c-236.389,34.777) -235.455,34.777 ; GLOW-VAC-DISP.18@-235.729,36.015 ccw(c-236.389,36.675) -235.455,36.675 ; GLOW-VAC-DISP.20@-235.729,37.977 cw(c-236.389,37.317) -235.455,37.317 ; GLOW-VAC-DISP.20@-235.729,38.555 ccw(c-236.389,39.215) -235.455,39.215 ; GLOW-VAC-DISP.22@-235.729,40.517 cw(c-236.389,39.857) -235.455,39.857 ; GLOW-VAC-DISP.22@-235.729,41.095 ccw(c-236.389,41.755) -235.455,41.755 ; GLOW-VAC-DISP.24@-235.729,43.057 cw(c-236.389,42.397) -235.455,42.397 ; GLOW-VAC-DISP.26@-235.729,45.597 cw(c-236.389,44.937) -235.455,44.937 ; -235.455,18.969 ccw(c-234.417,18.969) GLOW-VAC-DISP.4@-235.151,18.235 ; -235.455,19.463 cw(c-234.417,19.463) GLOW-VAC-DISP.6@-235.151,20.197 ; -235.455,21.509 ccw(c-234.417,21.509) GLOW-VAC-DISP.6@-235.151,20.775 ; -235.455,22.003 cw(c-234.417,22.003) GLOW-VAC-DISP.8@-235.151,22.737 ; -235.455,24.049 ccw(c-234.417,24.049) GLOW-VAC-DISP.8@-235.151,23.315 ; -235.455,24.543 cw(c-234.417,24.543) GLOW-VAC-DISP.10@-235.151,25.277 ; -235.455,26.589 ccw(c-234.417,26.589) GLOW-VAC-DISP.10@-235.151,25.855 ; -235.455,27.083 cw(c-234.417,27.083) GLOW-VAC-DISP.12@-235.151,27.817 ; -235.455,29.129 ccw(c-234.417,29.129) GLOW-VAC-DISP.12@-235.151,28.395 ; -235.455,29.623 cw(c-234.417,29.623) GLOW-VAC-DISP.14@-235.151,30.357 ; -235.455,31.669 ccw(c-234.417,31.669) GLOW-VAC-DISP.14@-235.151,30.935 ; -235.455,32.163 cw(c-234.417,32.163) GLOW-VAC-DISP.16@-235.151,32.897 ; -235.455,34.209 ccw(c-234.417,34.209) GLOW-VAC-DISP.16@-235.151,33.475 ; -235.455,34.703 cw(c-234.417,34.703) GLOW-VAC-DISP.18@-235.151,35.437 ; -235.455,36.749 ccw(c-234.417,36.749) GLOW-VAC-DISP.18@-235.151,36.015 ; -235.455,37.243 cw(c-234.417,37.243) GLOW-VAC-DISP.20@-235.151,37.977 ; -235.455,39.289 ccw(c-234.417,39.289) GLOW-VAC-DISP.20@-235.151,38.555 ; -235.455,39.783 cw(c-234.417,39.783) GLOW-VAC-DISP.22@-235.151,40.517 ; -235.455,41.829 ccw(c-234.417,41.829) GLOW-VAC-DISP.22@-235.151,41.095 ; -235.455,42.323 cw(c-234.417,42.323) GLOW-VAC-DISP.24@-235.151,43.057 ; -235.455,44.77 GLOW-VAC-DISP.24@-235.455,43.346 ; GLOW-VAC-DISP.4@-235.44,17.946 -235.455,17.946 GLOW-VAC-DISP.6@-235.455,20.486 ; GLOW-VAC-DISP.6@-235.44,20.486 GLOW-VAC-DISP.6@-235.455,20.486 ; GLOW-VAC-DISP.8@-235.44,23.026 GLOW-VAC-DISP.8@-235.455,23.026 ; GLOW-VAC-DISP.10@-235.44,25.566 GLOW-VAC-DISP.10@-235.455,25.566 ; GLOW-VAC-DISP.12@-235.44,28.106 GLOW-VAC-DISP.12@-235.455,28.106 ; GLOW-VAC-DISP.14@-235.44,30.646 GLOW-VAC-DISP.14@-235.455,30.646 ; GLOW-VAC-DISP.16@-235.44,33.186 GLOW-VAC-DISP.16@-235.455,33.186 ; GLOW-VAC-DISP.18@-235.44,35.726 GLOW-VAC-DISP.18@-235.455,35.726 ; GLOW-VAC-DISP.20@-235.44,38.266 GLOW-VAC-DISP.20@-235.455,38.266 ; GLOW-VAC-DISP.22@-235.44,40.806 GLOW-VAC-DISP.22@-235.455,40.806 ; GLOW-VAC-DISP.24@-235.44,43.346 GLOW-VAC-DISP.24@-235.455,43.346 ; GLOW-VAC-DISP.26@-235.44,45.886 -235.455,45.886 -235.455,44.87 cw(c-234.434,44.87) GLOW-VAC-DISP.26@-235.153,45.596 ; v1@-221.265,41.728 v1(-221.5,41.493) -221.5,39.95 -219.17,37.62 ; U3.29@-210.225,27.125 -211.802,27.125 -213.05,28.373 ; v1@-206.925,35.075 -206.925,36.225 -208.32,37.62 -219.17,37.62 ; v1(-206.9,35) -205.975,35 -204.85,33.875 -204.85,33.2 -205.55,32.5 U3.16@-205.55,31.8 ; U3.39@-206.2,23.75 -206.2,22.475 -206.83,21.845 -206.83,19.495 -207.1,19.225 -208.875,19.225 -213.05,23.4 -213.05,28.373 ; U2.54@-164.376,22.478 -164.386,22.478 U2.53@-164.386,22.878 ; U2.53@-164.376,22.878 U2.53@-164.386,22.878 ; U2.52@-164.376,23.278 U2.52@-164.386,23.278 ; U2.51@-164.376,23.678 U2.51@-164.386,23.678 ; U2.50@-164.376,24.078 U2.50@-164.386,24.078 ; U2.49@-164.376,24.478 U2.49@-164.386,24.478 ; U2.48@-164.376,24.878 U2.48@-164.386,24.878 ; U2.47@-164.376,25.278 U2.47@-164.386,25.278 ; U2.46@-164.376,25.678 U2.46@-164.386,25.678 ; U2.42@-164.376,27.278 U2.42@-164.386,27.278 ; U2.41@-164.376,27.678 -164.386,27.678 U2.42@-164.386,27.278 ; -162.676,29.689 U2.40@-162.676,29.378 -162.676,29.376 U2.39@-162.276,29.376 ; U2.39@-162.276,29.378 U2.39@-162.276,29.376 ; U2.63@-161.876,18.378 U2.64@-161.476,18.378 U2.65@-161.076,18.378 -161.076,17.946 -160.73,17.6 -160.222,17.6 -159.876,17.946 U2.68@-159.876,18.378 ; U2.38@-161.876,29.378 U2.38@-161.876,29.376 ; U2.37@-161.476,29.378 U2.37@-161.476,29.376 ; U2.36@-161.076,29.378 U2.36@-161.076,29.376 ; U2.35@-160.676,29.378 U2.35@-160.676,29.376 ; U2.34@-160.276,29.378 U2.34@-160.276,29.376 ; U2.32@-159.476,29.378 -159.476,28.774 -159.7,28.55 -160.127,28.55 -160.276,28.699 U2.34@-160.276,29.376 ; v1(-158.35,23.9) -157.215,22.765 v1(-157.215,22.328) ; U2.13@-153.376,24.878 -153.388,24.878 -153.388,25.278 U2.14@-153.376,25.278 ; U2.17@-153.376,26.478 -152.053,26.478 ; C10.2@-152.92,29.75 cw(c-153.204,29.274) -152.65,29.274 ; C10.2@-152.65,30.2 -152.65,29.274 ; C10.2@-152.38,29.75 ccw(c-152.096,29.274) -152.65,29.274 ; v1(-151.675,26.1) -152.053,26.478 ; C12.2@-146.75,25.675 -145.05,25.675 -143.8,24.425 v1@-139.925,24.425 ; C12.2@-146.435,25.41 cw(c-145.795,24.77) -145.795,25.675 cw(c-145.795,26.58) C12.2@-146.435,25.94 ; GLOW-VAC-DISP.6@-235.455,20.486 GLOW-VAC-DISP.8@-235.455,23.026 ; GLOW-VAC-DISP.8@-235.455,23.026 GLOW-VAC-DISP.10@-235.455,25.566 ; GLOW-VAC-DISP.10@-235.455,25.566 GLOW-VAC-DISP.12@-235.455,28.106 ; GLOW-VAC-DISP.12@-235.455,28.106 GLOW-VAC-DISP.14@-235.455,30.646 ; GLOW-VAC-DISP.14@-235.455,30.646 GLOW-VAC-DISP.16@-235.455,33.186 ; GLOW-VAC-DISP.16@-235.455,33.186 GLOW-VAC-DISP.18@-235.455,35.726 ; GLOW-VAC-DISP.18@-235.455,35.726 GLOW-VAC-DISP.20@-235.455,38.266 ; GLOW-VAC-DISP.20@-235.455,38.266 GLOW-VAC-DISP.22@-235.455,40.806 ; GLOW-VAC-DISP.22@-235.455,40.806 GLOW-VAC-DISP.24@-235.455,43.346 ; -219.17,37.62 -214.764,33.214 -214.764,30.087 -213.05,28.373 ; U2.53@-164.386,22.878 U2.52@-164.386,23.278 ; U2.52@-164.386,23.278 U2.51@-164.386,23.678 ; U2.51@-164.386,23.678 -164.615,23.678 -164.615,24.078 U2.50@-164.386,24.078 ; U2.50@-164.386,24.078 U2.49@-164.386,24.478 ; U2.49@-164.386,24.478 U2.48@-164.386,24.878 ; U2.48@-164.386,24.878 U2.47@-164.386,25.278 ; U2.47@-164.386,25.278 U2.46@-164.386,25.678 ; U2.46@-164.386,25.678 -164.386,26.078 U2.45@-164.376,26.078 -163.5,26.078 -163.5,26.878 U2.43@-164.376,26.878 -164.386,26.878 U2.42@-164.386,27.278 ; U2.39@-162.276,29.376 U2.38@-161.876,29.376 ; U2.38@-161.876,29.376 U2.37@-161.476,29.376 ; U2.37@-161.476,29.376 U2.36@-161.076,29.376 ; U2.36@-161.076,29.376 U2.35@-160.676,29.376 ; U2.35@-160.676,29.376 U2.34@-160.276,29.376 ; -152.65,29.274 -153.921,28.003 -153.921,26.697 -153.732,26.508 -152.083,26.508 -152.053,26.478 ; -153.701,26.476 ccw(c-153.596,26.581) -153.596,26.433 cw(c-153.596,26.581) -153.701,26.476
  Bottom Layer w0.25: v1(-158.35,23.9) -158.075,23.9 -157.5,24.475 -157.5,26.6 C9.2@-157.75,26.85 ; v1(-157.215,22.328) -156.475,23.068 -156.475,23.7 -154.075,26.1 v1(-151.675,26.1) ; FB1.2@-141.075,21.15 -141.075,19.925 -140.7,19.55 -139.375,19.55 -138.525,20.4 -138.525,23.975 -139.003,24.453 v1(-139.865,24.453)
  other v1: -186.54,8.578 -230.265,10.528 -127.05,15.35 -70.559,16.295 -144.24,17.078 -144.24,19.478 -206.05,19.825 -162.765,19.853 -135.89,20.403 -191.465,21.453 -131.815,22.128 -195.875,23.125 -129.19,26.928 -195.49,27.403 -214.465,27.503 -190.94,28.378 -159.515,28.403 -221.44,29.828 -173.34,32.303 -152.59,34.978 -202.39,36.503